# Altium PCB pcb.PcbDoc
Units mil, origin at the board's own origin, x right, y up, seen from the top; angles counter-clockwise.
Board outline 4000 x 3000 mil, 2 copper layers (Top Layer, Bottom Layer); 33 components, 22 nets, 142 pads, 0 vias.
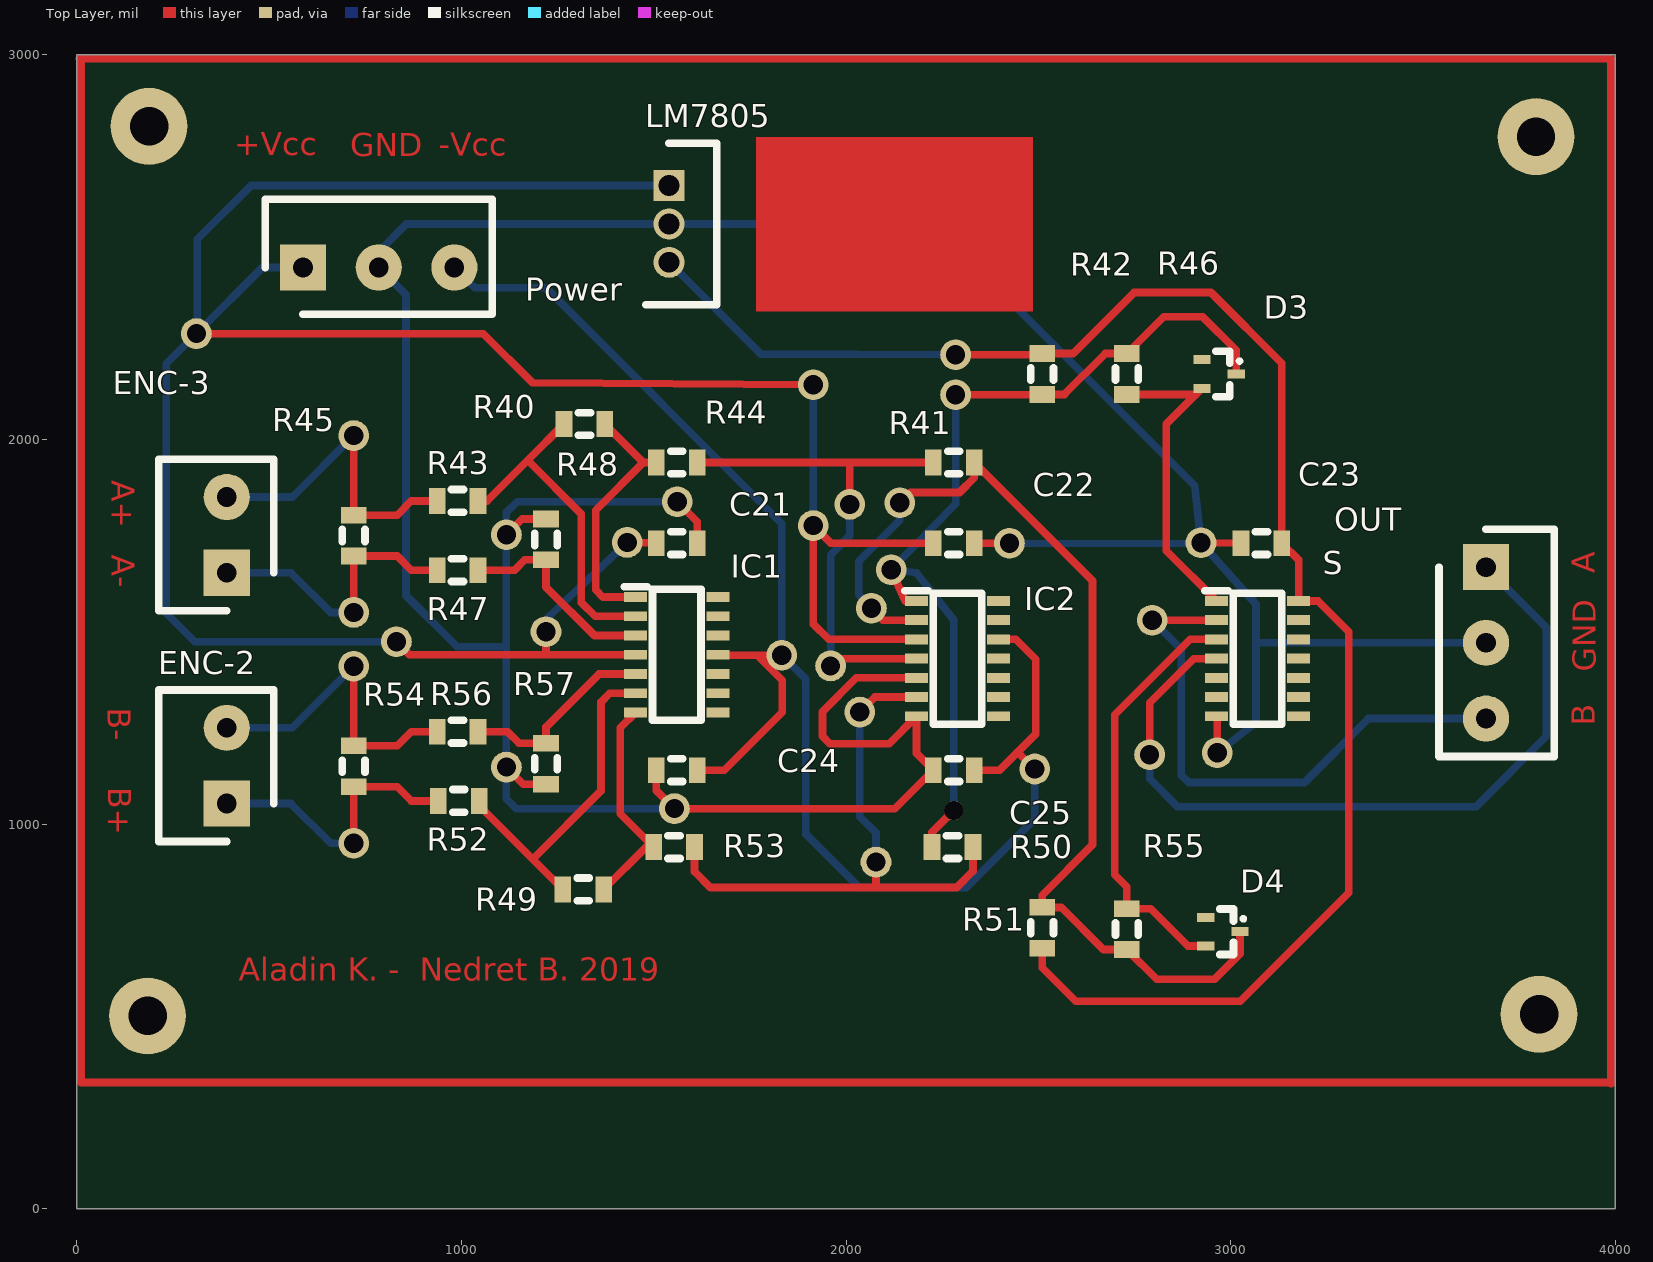
[diagram p0: Top Layer view]
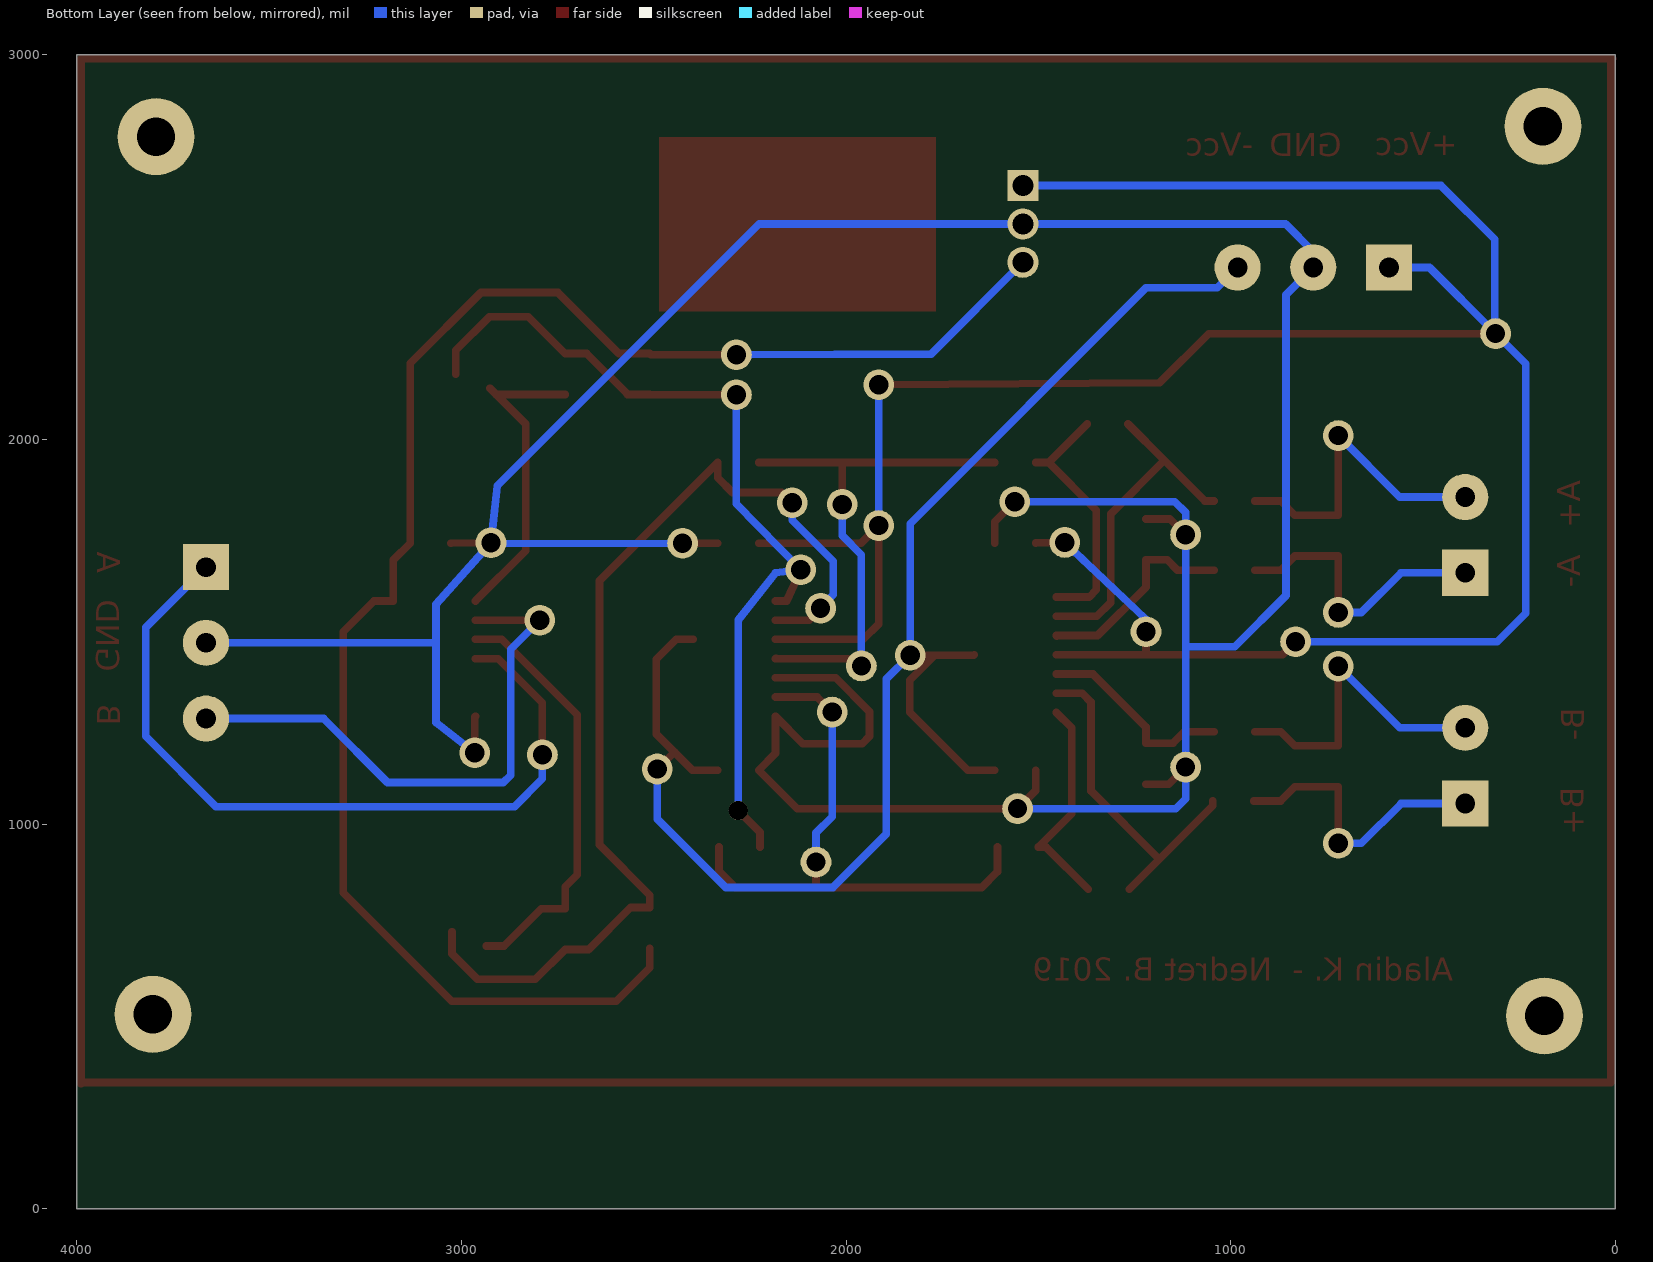
[diagram p1: Bottom Layer view, seen from below]

## Layer stack, top to bottom
Top Solder: solder mask 0.4, Solder Resist, Dk 3.5
Top Layer: signal copper 5
Dielectric 1: dielectric 12.6, FR-4, Dk 4.8
Bottom Layer: signal copper 1.4
Bottom Solder: solder mask 0.4, Solder Resist, Dk 3.5

## Board outline
0,0 4000,0 4000,3000 0,3000

## Design rules (kind name [scope] priority, off if disabled: settings)
Clearance [All] p1: gap=10 ignorepadtopadclearanceinfootprint=FALSE except(0: Arc-Hole Track-Hole SMDPad-Hole THPad-Hole Via-Hole Fill-Hole Poly-Hole Region-Hole Text-Hole)
PolygonConnect [All] p1: connectstyle=Relief reliefconductorwidth=10 reliefentries=4 polygonreliefangle="90 Angle" airgapwidth=10
RoutingVias [All] p1: holewidth=28 width=50 viastyle="Through Hole" minholewidth=28 minwidth=50 maxholewidth=28 maxwidth=50
SolderMaskExpansion [All] p1: expansion=4
Width [All] p1: maxlimit=10 minlimit=10 preferedwidth=10
30 further rules are at their usual default settings.

## Components (designator, comment, footprint, x,y, rotation, side; value= is the part's Value field where it differs from the comment)
C21 "Cap Pol3" C1206 1560,1730 r0 top value=100nF
C22 "Cap Pol3" C1206 2280,1730 r0 top value=100pF
C23 "Cap Pol3" C1206 3080,1730 r180 top value=100pF
C24 "Cap Pol3" C1206 1560,1140 r0 top value=100pF
C25 "Cap Pol3" C1206 2280,1140 r0 top value=100pF
D3 "Diode 1N4001" SOT23_N 2970,2170 r0 top
D4 "Diode 1N4001" SOT23_N 2980,720 r0 top
ENC-2 "DG301-5.0-2P-12" SHDR2W110P0X500_1X2_1000X760X1000P 390,1053.15 r90 top
ENC-3 "DG301-5.0-2P-12" SHDR2W110P0X500_1X2_1000X760X1000P 390,1653.15 r90 top
IC1 "LM324AM" SOIC127P600X175-14N 1560,1440 r0 top
IC2 "LM339AM" SOIC127P600X175-14N 2290,1430 r0 top
LM7805 "LM7805ACT" TO254P470X1016X2019-3P 1540,2660 r270 top
OUT "DG301-5.0-3P-12" SHDR3W110P0X500_1X3_1500X760X1000P 3664,1667.85 r270 top
Power "DG301-5.0-3P-12" SHDR3W110P0X500_1X3_1500X760X1000P 588.15,2447 r0 top
R40 "Res3" C1206 1320,2040 r0 top value=10M
R41 "Res3" C1206 2280,1940 r0 top value=1M
R42 "Res3" C1206 2510,2170 r90 top value=1K
R43 "Res3" C1206 990,1840 r0 top value=1K
R44 "Res3" C1206 1560,1940 r0 top value=10K
R45 "Res3" C1206 720,1750 r90 top value=47K
R46 "Res3" C1206 2730,2170 r90 top value=1M
R47 "Res3" C1206 990,1660 r0 top value=1K
R48 "Res3" C1206 1220,1740 r270 top value=1M
R49 "Res3" C1206 1316.85,830 r0 top value=1M
R50 "Res3" C1206 2276.85,940 r180 top value=1M
R51 "Res3" C1206 2510,730 r270 top value=1K
R52 "Res3" C1206 993.15,1060 r0 top value=1K
R53 "Res3" C1206 1553.15,940 r0 top value=1K
R54 "Res3" C1206 720,1150 r90 top value=47K
R55 "Res3" C1206 2730,726.85 r270 top value=1M
R56 "Res3" C1206 990,1240 r0 top value=1K
R57 "Res3" C1206 1220,1156.85 r90 top value=1M
S "Component_1" SOIC127P600X175-14N 3070,1430 r0 top

## Footprints (in the part's own frame and the unit in brackets; to place one, negate y for a bottom-side part, rotate by r counter-clockwise, add the part's x,y. Pads: shape width x height; smd on the part's side, far side on the other; paste and mask are expansions set on the pad)
C1206 [mm] "Chip Capacitor, Body 3.2x1.6mm, IPC High Density"
  rect 1.1x1.7 smd: 1(-1.35,0) 2(1.35,0)
  silkscreen extent -0.4,-0.75 0.4,0.75, body extent -1.7,-0.9 1.7,0.9, height 1.3
SHDR2W110P0X500_1X2_1000X760X1000P [mil]
  rect 120x120 hole 51.18: 1(0,0)
  round 120 hole 51.18: 2(196.85,0)
  silkscreen extent -98,-122 295,177
SHDR3W110P0X500_1X3_1500X760X1000P [mil]
  rect 120x120 hole 51.18: 1(0,0)
  round 120 hole 51.18: 2(196.85,0) 3(393.7,0)
  silkscreen extent -98,-122 492,177
SOIC127P600X175-14N [mm]
  rect 1.525x0.65 smd: 1(-2.712,3.81) 2(-2.712,2.54) 3(-2.712,1.27) 4(-2.712,0) 5(-2.712,-1.27) 6(-2.712,-2.54) 7(-2.712,-3.81) 8(2.712,-3.81) 9(2.712,-2.54) 10(2.712,-1.27) 11(2.712,0) 12(2.712,1.27) 13(2.712,2.54) 14(2.712,3.81)
  silkscreen extent -3.47,-4.33 1.6,4.48, body extent -3,-4.33 3,4.33, height 1.75
SOT23_N [mm] "SOT23, 3-Leads, Body 2.9x1.3mm, Pitch 0.95mm, Lead Span 2.3mm - Reverse Pinning, IPC Medium Density"
  rect 1.15x0.6 smd: 1(1.125,0) 2(-1.125,-0.95) 3(-1.125,0.95)
  silkscreen extent -0.2,-1.5 1.48,1.5, body extent -0.7,-1.5 0.7,1.5, height 1.1
TO254P470X1016X2019-3P [mm]
  rect 2.055x2.055 hole 1.37: 1(0,0)
  round 2.055 hole 1.37: 2(2.535,0) 3(5.07,0)
  silkscreen extent -2.8,-1.55 7.87,3.15, body extent -2.55,-1.55 7.61,3.15, height 18.54

## Part data
C21 C22 C23 C24 C25: "Polarized Capacitor (Surface Mount)", LatestRevisionDate=29-May-2009, LatestRevisionNote="IPC-7351 Footprint Added.", PackageDescription="Chip Capacitor", PackageReference=C0805, Published=8-Jun-2000, Publisher="Altium Limited"
D3 D4: "1 Amp General Purpose Rectifier", Code_JEDEC=DO-204-AL, ComponentLink1Description="Manufacturer Link", ComponentLink1URL=http://www.fairchildsemi.com/, ComponentLink2Description=Datasheet, ComponentLink2URL=http://www.fairchildsemi.com/ds/1N%2F1N4001.pdf, DatasheetVersion=1998, LatestRevisionDate=17-Jul-2002, LatestRevisionNote="Re-released for DXP Platform.", PackageDescription="Diode, Axial; Body 5.2 x 2.7 mm (LxDia. max), Lead Dia. 0.86 mm (max)", PackageReference=DO-41, PackageVersion=Aug-1999, Published=8-Jun-2000, Publisher="Altium Limited"
ENC-2 ENC-3 OUT Power: "Connector", Manufacturer_Name=Degson, Datasheet Link=https://www.tme.eu/gb/Document/72ad9f371bb0c16572574ac47903b3a1/DG301-5.0.pdf, Height=10mm
  ENC-2 ENC-3: Manufacturer_Part_Number=DG301-5.0-2P-12
  OUT Power: Manufacturer_Part_Number=DG301-5.0-3P-12
IC1: "Integrated Circuit", Manufacturer_Name="Texas Instruments", Mouser Part Number=926-LM324AM, RS Part Number=4713839, Datasheet Link=http://www.ti.com/lit/ds/symlink/lm324-n.pdf, Height=1.75mm, Manufacturer_Part_Number=LM324AM, Mouser Price/Stock=https://www.mouser.com/Search/Refine.aspx?Keyword=926-LM324AM
IC2: "Integrated Circuit", Manufacturer_Name="Texas Instruments", Mouser Part Number=926-LM339AM, RS Part Number=6364697, Datasheet Link=http://www.ti.com/lit/ds/symlink/lm339-n.pdf, Height=1.75mm, Manufacturer_Part_Number=LM339AM, Mouser Price/Stock=https://www.mouser.com/Search/Refine.aspx?Keyword=926-LM339AM
LM7805: "Integrated Circuit", Manufacturer_Name="Fairchild Semiconductor", Mouser Part Number=512-LM7805ACT, RS Part Number=8062839, Datasheet Link=http://www.farnell.com/datasheets/1936075.pdf, Height=4.7mm, Manufacturer_Part_Number=LM7805ACT, Mouser Price/Stock=https://www.mouser.com/Search/Refine.aspx?Keyword=512-LM7805ACT, RS Price/Stock=http://uk.rs-online.com/web/p/products/8062839
R40 R41 R42 R43 R44 R45 R46 R47 R48 R49 R50 R51 R52 R53 R54 R55 R56 R57: "Resistor", LatestRevisionDate=29-May-2009, LatestRevisionNote="IPC-7351 Footprint Added.", PackageDescription="Chip Resistor", PackageReference=J1-0603, Published=8-Jun-2000, Publisher="Altium Limited"

## Free pads (board coordinates)
  round 80 hole 50: 42(720,2010) 43(720,1550) 44(720,1410) 45(720,950) 46(1117,1752) 47(1117,1148) 48(1554,1040) 49(1561,1838) 52(1915,2142) 53(311,2275) 54(831,1474) 55(1833,1439) 56(1915,1776) 57(2010,1831) 58(1960,1411) 59(2140,1835) 62(2066,1561) 63(2117.36,1661) 64(2285,2220) 65(2285,2116) 66(2923,1731) 67(2425,1730) 68(2965,1185) 70(2036,1291) 71(2078,901) 72(2491,1143) 74(1431,1732) 75(1220,1500) 76(2796,1530) 77(2789.4,1180)
  round 50 hole 50: 69(2280,1035)
  round 200 hole 100: 78(188,2814) 79(3794,2787) 80(3802,505) 81(184,501)

## Nets (pads, with @x,y where several pads share a name; then routed paths per layer and width w, separated by ;. In a path a pad name is that pad's centre, name@x,y a point inside that pad or via, vN(x,y) a via of type N, cw(c..) or ccw(c..) an arc to the next point about the centre after c; other vN are vias at no path point)
GND: C21.2 C22.2 C23.2 C24.1 C25.1 IC2.5 IC2.7 LM7805.2 OUT.2 pad.46 pad.47 pad.48 pad.49 pad.66 pad.67 pad.68 Power.2 R48.1 R57.1 S.7 | length 9497.5
  Top Layer w20: pad.47 1161.3,1103.7 R57.1 ; pad.46 1158.15,1793.15 R48.1 ; C24.1 1506.85,1087.15 pad.48 2126.85,1040 C25.1 2183.23,1183.62 IC2.7 2112.23,1209 1958,1209 1939,1228 1939,1292 2027,1380 IC2.5 ; pad.49 1613.15,1785.85 C21.2 ; C22.2 pad.67 ; pad.66 C23.2 ; S.7 2965,1278.23 pad.68
  Bottom Layer w20: pad.48 1143,1040 1117,1066 pad.47 1117,1461 ; pad.49 1145,1838 1117,1810 pad.46 1117,1461 ; pad.67 2906,1729 pad.66 ; pad.68 3066,1264 3066,1474 ; OUT.2 3069,1471 3066,1474 ; 1117,1461 989,1461 856,1594 856,2376 Power.2 785,2488 857.2,2560.2 LM7805.2 2225.8,2560.2 2907,1879 pad.66 ; pad.66 3066,1571 3066,1474
NetD3_1: D3.1 IC2.1 pad.63 pad.65 pad.69 R42.1 R46.2 R50.2 | length 2388.9
  Top Layer w20: pad.63 2154,1580 IC2.1 ; R50.2 2223.7,978.7 pad.69 ; pad.65 2509.15,2116 R42.1 2567.85,2116.85 2674.15,2223.15 R46.2 2825.85,2319 2927,2319 3014.29,2231.71 D3.1
  Bottom Layer w20: pad.69 2280,1530.27 2183.52,1653.06 pad.63 2285,1833 pad.65
NetD3_2: D3.2 R46.1 S.1 | length 824.9
  Top Layer w20: R46.1 2909.96,2116.85 ; D3.2 2909.96,2116.85 ; S.1 2833,1710.23 2833,2039.89 2909.96,2116.85
NetD4_1: D4.1 IC2.2 pad.59 pad.62 R41.2 R51.1 R55.2 | length 2737.5
  Top Layer w20: pad.62 2096,1530 IC2.2 ; pad.59 2167,1862 2295,1862 2333.15,1900.15 R41.2 2641,1632.15 2641,946 2510,815 R51.1 2559.85,783.15 2669.3,673.7 R55.2 2807.7,596 2958,596 3024.29,662.29 D4.1
  Bottom Layer w20: pad.62 2033,1595.72 2033,1683 2140,1790 pad.59
NetD4_2: D4.2 R55.1 S.3 | length 1108.3
  Top Layer w20: D4.2 2889.4,682.6 2792,780 R55.1 2730,837 2699,868 2699,1284 2895,1480 S.3
NetENC-2_1: ENC-2.1 pad.45 R52.1 R54.1 | length 754.8
  Top Layer w20: pad.45 R54.1 833.15,1096.85 870,1060 R52.1
  Bottom Layer w20: ENC-2.1 556.85,1053.15 660,950 pad.45
NetENC-2_2: ENC-2.2 pad.44 R54.2 R56.1 | length 835.2
  Top Layer w20: pad.44 R54.2 833.15,1203.15 870,1240 R56.1
  Bottom Layer w20: ENC-2.2 560,1250 pad.44
NetENC-3_1: ENC-3.1 pad.43 R45.1 R47.1 | length 751.7
  Top Layer w20: pad.43 R45.1 833.15,1696.85 870,1660 R47.1
  Bottom Layer w20: ENC-3.1 556.85,1653.15 660,1550 pad.43
NetENC-3_2: ENC-3.2 pad.42 R43.1 R45.2 | length 835.2
  Top Layer w20: pad.42 R45.2 833.15,1803.15 870,1840 R43.1
  Bottom Layer w20: ENC-3.2 560,1850 pad.42
NetIC1_1: IC1.1 R40.2 R44.1 | length 669.6
  Top Layer w20: R40.2 1473.15,1940 ; IC1.1 1368,1590 1349,1609 1349,1815.85 1473.15,1940 ; R44.1 1473.15,1940
NetIC1_2: IC1.2 R40.1 R43.2 | length 890.1
  Top Layer w20: R43.2 1066.85,1840 1172.43,1945.57 ; R40.1 1172.43,1945.57 ; IC1.2 1348,1540 1312,1576 1312,1806 1172.43,1945.57
NetIC1_3: IC1.3 R47.2 R48.2 | length 545.7
  Top Layer w20: R47.2 1138,1660 1164.85,1686.85 R48.2 1220,1616 1346,1490 IC1.3 IC1.3@1452.23,1489
NetIC1_5: IC1.5 R56.2 R57.2 | length 521.7
  Top Layer w20: R56.2 1120,1240 1150,1210 R57.2 1220,1252 1358,1390 IC1.5
NetIC1_6: IC1.6 R49.1 R52.2 | length 902
  Top Layer w20: R52.2 1046.3,1047.4 1185.35,908.35 ; R49.1 1185.35,908.35 ; IC1.6 1386,1340 1363,1317 1363,1086 1185.35,908.35
NetIC1_7: IC1.7 R49.2 R53.1 | length 578.3
  Top Layer w20: R49.2 1480,940 R53.1 1413,1027 1413,1249.77 IC1.7
NetIC2_4: IC2.4 pad.57 pad.58 R41.1 R44.2 | length 1423
  Top Layer w20: R44.2 2009,1940 ; pad.58 1979,1430 IC2.4 IC2.4@2182.23,1431 ; pad.57 2010,1939 2009,1940 ; R41.1 2009,1940
  Bottom Layer w20: pad.58@1986,1416.78 pad.58 1960,1700 2010,1750 pad.57
NetIC2_6: IC2.6 pad.70 pad.71 R50.1 R53.2 | length 1523.3
  Top Layer w20: R53.2 1606.3,875.7 1647,835 2075,835 ; pad.70 2075,1330 IC2.6 ; pad.71 2078,838 2075,835 ; R50.1 2330,877 2288,835 2075,835
  Bottom Layer w20: pad.70 2036,1019 2078,977 pad.71
NetOUT_1: OUT.1 pad.77 S.4 | length 2080.3
  Top Layer w20: pad.77 2789.4,1315.4 2904,1430 S.4
  Bottom Layer w20: pad.77@2780.5,1196.64 pad.77 2789.4,1117.6 2862,1045 3638,1045 3821,1228 3821,1510.85 OUT.1
NetOUT_3: OUT.3 pad.76 S.2 | length 1470.4
  Top Layer w20: pad.76 S.2
  Bottom Layer w20: pad.76 2872,1454 2872,1127 2891,1108 3192,1108 3358.15,1274.15 OUT.3
"VCC +5V": C23.1 LM7805.3 pad.64 R42.2 R51.2 S.14 | length 4314.3
  Top Layer w20: pad.64 2506.85,2220 R42.2 2590.15,2223.15 2749,2382 2949,2382 3133.15,2197.85 C23.1 3176.77,1686.38 S.14 3227,1580 3307,1500 3307,821 3025,539 2597,539 2510,626 R51.2
  Bottom Layer w20: LM7805.3 1778.39,2222 pad.64
"VCC +15V": C21.1 C22.1 IC1.4 IC2.3 LM7805.1 pad.52 pad.53 pad.54 pad.56 pad.74 pad.75 Power.1 | length 7254.9
  Top Layer w20: pad.53 1057,2275 1185,2147 pad.52 ; pad.54 865,1440 1222,1440 ; pad.75 1220,1442 1222,1440 ; pad.74 1505.85,1731 C21.1 ; IC1.4 1222,1440 ; IC2.3 1955,1480 1915,1520 pad.56 1961,1730 C22.1
  Bottom Layer w20: Power.1 483,2447 pad.53@313.15,2277.15 ; pad.54 307,1474 233,1548 233,2197 pad.53 pad.53@313.15,2277.15 ; pad.75 1220,1532 pad.74 ; LM7805.1 453.15,2660 313.15,2520 pad.53@313.15,2277.15 ; pad.56 pad.52
"VCC -15": C24.2 C25.2 IC1.11 IC2.12 pad.55 pad.72 Power.3 | length 4015.7
  Top Layer w20: C24.2 1683,1140 1834,1291 1834,1374 1769,1439 ; IC1.11 1667.77,1439 1769,1439 ; pad.55 1769,1439 ; C25.2 2399,1140 2446,1187 ; IC2.12 2441,1480 2493,1428 2493,1234 2446,1187 ; pad.72 2447,1187 2446,1187
  Bottom Layer w20: Power.3 1034.85,2394 1220,2394 1833,1781 pad.55 1895,1377 1895,974 2034,835 2313,835 2491,1013 pad.72
pads on no net: D3.3 D4.3 IC1.8 IC1.9 IC1.10 IC1.12 IC1.13 IC1.14 IC2.8 IC2.9 IC2.10 IC2.11 IC2.13 IC2.14 S.5 S.6 S.8 S.9 S.10 S.11 S.12 S.13
copper on no net: | length 13284.2
  Top Layer w20: 7,2990 3989,2990 3989,325 3986,328 11,328 11,2986

## Other copper
Top Layer:
  rectangle: 1766,2333 2486,2786
  text "+Vcc" at 410,2739 h60
  text "-Vcc" at 941,2738 h60
  text "GND" at 711,2736 h60
  text "A+" at 91,1894 h60 r270
  text "A-" at 91,1700 h60 r270
  text "A" at 3947,1652 h60 r90
  text "GND" at 3949,1396 h60 r90
  text "B-" at 80,1302 h60 r270
  text "B" at 3947,1256 h60 r90
  text "B+" at 82,1096 h60 r270
  text "Aladin K. -  Nedret B. 2019" at 421,593 h60